# EAGLE board nonov1 (EAGLE 6.4)
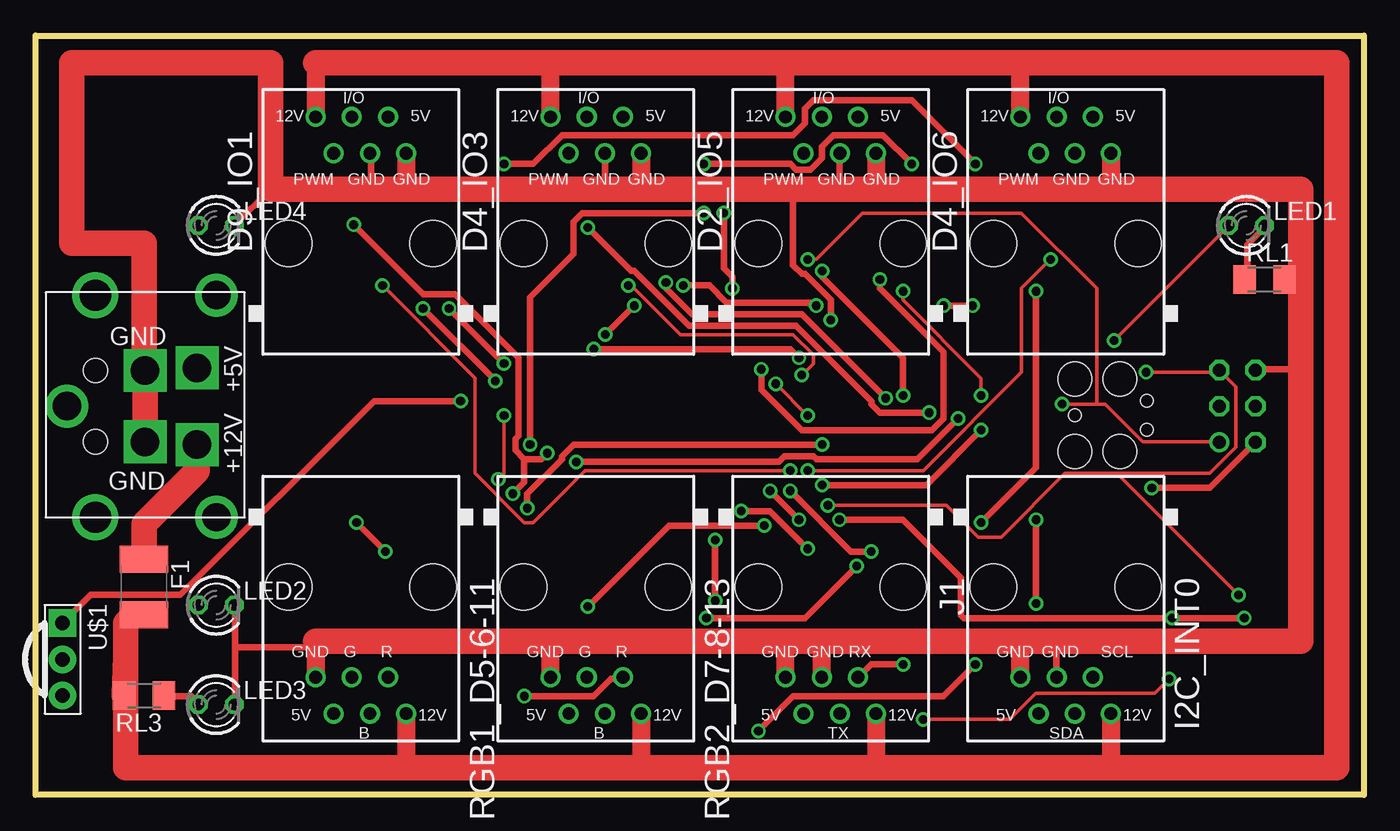
[diagram p0: board, top side]
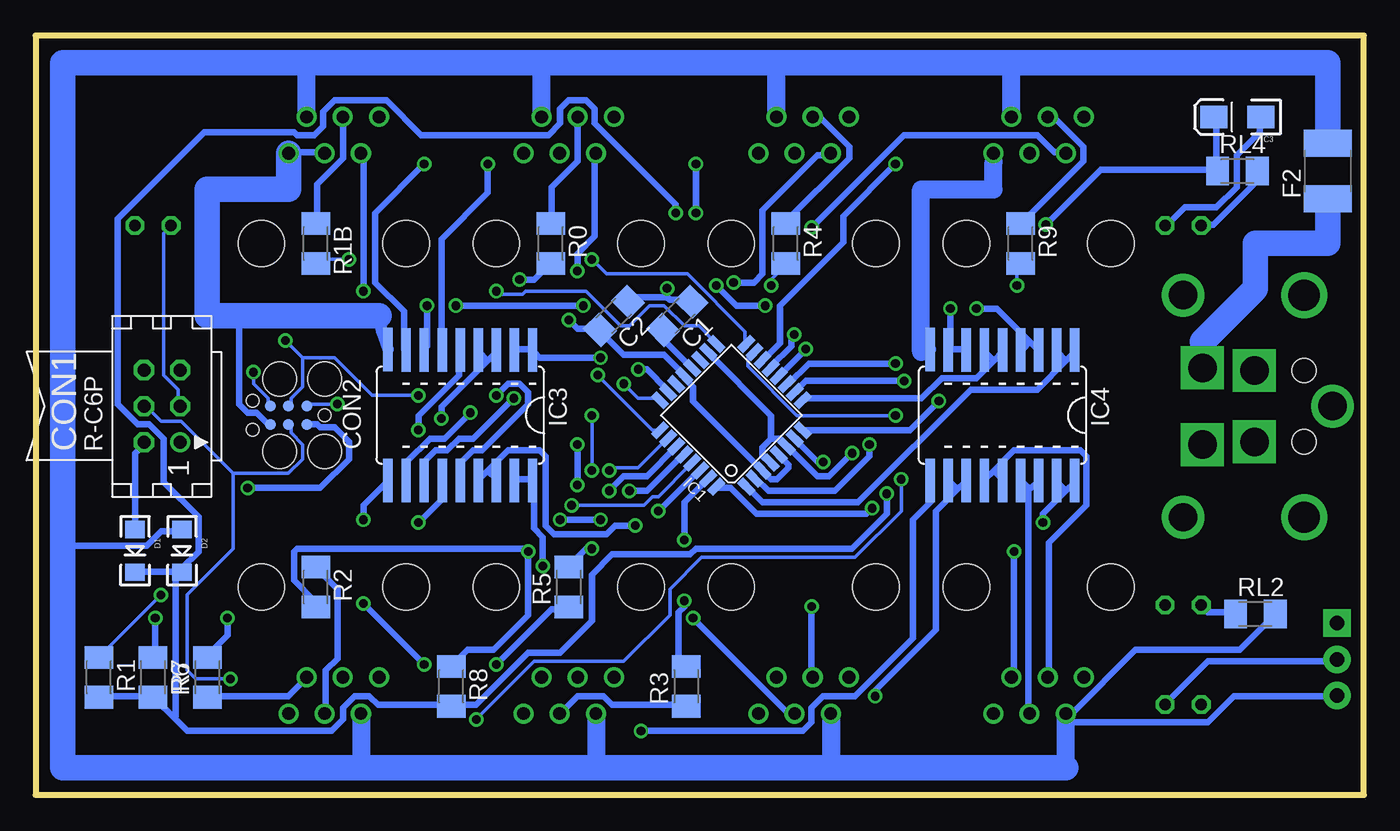
[diagram p1: board, bottom side, seen from below]

Size 93.34 x 53.34 mm. Coordinates in mm from the lower left corner, seen from the top.
Outline: 0,0 0,53.34 93.34,53.34 93.34,0 0,0
Copper layers (1*16): Top 0.035mm / dielectric 1.5mm / Bottom 0.035mm
Design rules "default *": minimum track width 10mil, minimum drill 24mil, track to track 8mil, track to pad 8mil, pad to pad 8mil, via to via 8mil, smd to smd 8mil, copper to edge 6mil, drill to drill 6mil, minimum pad ring 10mil, minimum via ring 8mil, stop-mask expansion 4mil, vias tented up to drill 0mil, thermal gap 10mil
Net classes: 0 default: width 0.457 mm; 1 power: width 0.457 mm; 2 highpower: width 0.914 mm; 3 fine: width 0.203 mm
vRestrict: area 35.7,17.5 to 53.6,35.5; area 19,19.7 to 31.8,24.8; area 19,28.6 to 31.8,33.7; area 57.2,28.6 to 69.8,33.7; area 57.2,19.7 to 69.8,24.8

## Footprints (pad centres in the part's own frame; a part is rotated, then mirrored left to right if it is on the bottom)
C1206 = smd 1.6 x 1.8: 1 -1.4,0; 2 1.4,0
EIA3216-KIT = smd 1.9 x 1.6: A 1.65,0; C -1.65,0
TINYISP = drill 0.914 octagon: GND 2.54,1.27; MOSI 0,1.27; RESET 2.54,-1.27; SCK 0,-1.27; VCC -2.54,1.27 | drill 0.914: MISO -2.54,-1.27
TC2030-MCP = smd 0.787 x 0.787: 5V 1.27,0.635; GND 3.81,0.635; MISO 1.27,-0.635; MOSI 2.54,0.635; RESET 3.81,-0.635; SCK 2.54,-0.635 | hole 0.889: 0,0; 5.08,-1.016; 5.08,1.016 | hole 2.375: 0,2.54; 0,-2.54; 3.175,-2.54; 3.175,2.54
LED-1206 = smd 1.2 x 1.4: A -1.5,0; C 1.5,0
RJ12-STRAIGHT = drill 0.9 pad 1.4: +5V 1.905,8.89; +12V -3.175,8.89; GND1 3.175,6.35; GND2 0.635,6.35; I/O -0.635,8.89; PWM -1.905,6.35 | hole 3.251: -5.08,0; 5.08,0
C1812 = smd 1.9 x 3.4: 1 -1.95,0; 2 1.95,0
RJ12-STRAIGHT-I2C = drill 0.9 pad 1.4: +5V 1.905,8.89; +12V -3.175,8.89; GND1 3.175,6.35; GND2 0.635,6.35; SCL -1.905,6.35; SDA -0.635,8.89 | hole 3.251: -5.08,0; 5.08,0
TQFP32-08 = smd 1.27 x 0.559: 1 -4.293,2.8; 2 -4.293,2; 3 -4.293,1.2; 4 -4.293,0.4; 5 -4.293,-0.4; 6 -4.293,-1.2; 7 -4.293,-2; 8 -4.293,-2.8; 17 4.293,-2.8; 18 4.293,-2; 19 4.293,-1.2; 20 4.293,-0.4; 21 4.293,0.4; 22 4.293,1.2; 23 4.293,2; 24 4.293,2.8 | smd 0.559 x 1.27: 9 -2.8,-4.293; 10 -2,-4.293; 11 -1.2,-4.293; 12 -0.4,-4.293; 13 0.4,-4.293; 14 1.2,-4.293; 15 2,-4.293; 16 2.8,-4.293; 25 2.8,4.293; 26 2,4.293; 27 1.2,4.293; 28 0.4,4.293; 29 -0.4,4.293; 30 -1.2,4.293; 31 -2,4.293; 32 -2.8,4.293
SO18W = smd 0.66 x 3.048: 1 -5.08,-4.585; 2 -3.81,-4.585; 3 -2.54,-4.585; 4 -1.27,-4.585; 5 0,-4.585; 6 1.27,-4.585; 7 2.54,-4.585; 8 3.81,-4.585; 9 5.08,-4.623; 10 5.08,4.585; 11 3.81,4.585; 12 2.54,4.585; 13 1.27,4.585; 14 0,4.585; 15 -1.27,4.585; 16 -2.54,4.585; 17 -3.81,4.585; 18 -5.08,4.585
RJ12-STRAIGHT-RS232 = drill 0.9 pad 1.4: +5V 1.905,8.89; +12V -3.175,8.89; GND1 3.175,6.35; GND2 0.635,6.35; RX -1.905,6.35; TX -0.635,8.89 | hole 3.251: -5.08,0; 5.08,0
LED3MM = drill 0.813 octagon: A -1.27,0; K 1.27,0
M1206 = smd 1.6 x 2: 1 -1.4,0; 2 1.4,0
RJ12-STRAIGHT-RGB = drill 0.9 pad 1.4: +5V 1.905,8.89; +12V -3.175,8.89; B -0.635,8.89; G 0.635,6.35; GND1 3.175,6.35; R -1.905,6.35 | hole 3.251: -5.08,0; 5.08,0
PNA460XM = drill 1.016 pad 1.93 square: 1 -2.54,0 | drill 1.016 pad 1.93: 2 0,0; 3 2.54,0
KPJX-4S-S = drill 2 square: +5V 2.7,1.35; +12V -2.7,1.35; GND1 -2.5,5; GND2 2.5,5 | drill 2: P$1 -7.8,0; P$2 7.8,0; P$11 0,10.5 | drill 2.2: P$3 -7.8,8.5; P$4 7.8,8.5 | hole 1.7: -2.5,8.5; 2.5,8.5

## Placement (x,y rotation side)
C1  0.1uF  [C1206]  48.26,33.66 225 bottom
C2  0.1uF  [C1206]  52.7,33.66 225 bottom
C3  10uF 20V  [EIA3216-KIT]  8.89,47.62 180 bottom
CON1  [TINYISP]  84.45,27.31 90 bottom
CON2  [TC2030-MCP]  73.03,26.67 180 bottom
D1  1N581D1206  [LED-1206]  86.36,17.15 270 bottom
D2  1N581D1206  [LED-1206]  83.06,17.15 270 bottom
D2_IO5  IO5  [RJ12-STRAIGHT]  55.88,38.73 0 top
D4_IO3  IO3  [RJ12-STRAIGHT]  39.37,38.73 0 top
D4_IO6  IO6  [RJ12-STRAIGHT]  72.39,38.73 0 top
D9_IO1  IO1  [RJ12-STRAIGHT]  22.86,38.73 0 top
F1  POLYSWITCHSMD1812  [C1812]  7.62,14.61 270 top
F2  POLYSWITCHSMD1812  [C1812]  2.54,43.81 90 bottom
I2C_INT0  I2C  [RJ12-STRAIGHT-I2C]  72.39,14.61 180 top
IC1  MEGA8-AI  [TQFP32-08]  44.45,26.67 135 bottom
IC3  ULN2803A  [SO18W]  63.5,26.67 180 bottom
IC4  ULN2803A  [SO18W]  25.4,26.67 180 bottom
J1  RJ12STRAIGHT-RS232-SERVER  [RJ12-STRAIGHT-RS232]  55.88,14.61 180 top
LED1  [LED3MM]  85.09,40 0 top
LED2  [LED3MM]  12.7,13.33 0 top
LED3  [LED3MM]  12.7,6.35 0 top
LED4  [LED3MM]  12.7,40 0 top
R0  1K  [M1206]  57.15,38.73 270 bottom
R1  10k  [M1206]  88.9,8.26 270 bottom
R1B  1K  [M1206]  73.66,38.73 270 bottom
R2  1K  [M1206]  73.66,14.61 270 bottom
R3  1K  [M1206]  47.62,7.62 90 bottom
R4  1K  [M1206]  40.64,38.73 270 bottom
R5  1K  [M1206]  55.88,14.61 90 bottom
R6  1K  [M1206]  81.28,8.26 90 bottom
R7  10K  [M1206]  85.09,8.26 270 bottom
R8  10K  [M1206]  64.14,7.62 270 bottom
R9  1K  [M1206]  24.13,38.73 270 bottom
RGB1_D5-6-11  RGB1  [RJ12-STRAIGHT-RGB]  22.86,14.61 180 top
RGB2_D7-8-13  RGB2  [RJ12-STRAIGHT-RGB]  39.37,14.61 180 top
RL1  1K  [M1206]  86.36,36.2 0 top
RL2  1K  [M1206]  7.62,12.7 0 bottom
RL3  1K  [M1206]  7.62,6.98 180 top
RL4  1K  [M1206]  8.89,43.81 0 bottom
U$1  PNA460XM  [PNA460XM]  1.91,9.53 270 top
U$2  KPJX-4S-S  [KPJX-4S-S]  12.7,27.31 90 top

## Library data of the parts
C1 C2 R0 R1 R1B R2-R9 RL1-RL4 = resistor
C3 = SparkFun
CON1 = lpatiny; OC_FARNELL: unknown; OC_NEWARK: unknown
CON2 D1 D2 D2_IO5 D4_IO3 D4_IO6 D9_IO1 F1 F2 I2C_INT0 IC3 IC4 J1 LED1-LED4 RGB1_D5-6-11 RGB2_D7-8-13 U$2 = lpatiny
IC1 = atmel; MPN: ATMEGA8-16AU; OC_FARNELL: 9171371; OC_NEWARK: 73M8863
U$1 = adafruit

## Nets
5V [power]: C1.1 C2.1 C3.A D1.C D2.C IC1.4 IC1.6 IC1.18 R1.2 R7.2 R8.2 RL4.1
+5V: D2.A D2_IO5.+5V D4_IO3.+5V D4_IO6.+5V D9_IO1.+5V F2.2 I2C_INT0.+5V J1.+5V RGB1_D5-6-11.+5V RGB2_D7-8-13.+5V RL2.2 U$1.3
+12V [highpower]: D2_IO5.+12V D4_IO3.+12V D4_IO6.+12V D9_IO1.+12V F1.2 I2C_INT0.+12V J1.+12V RGB1_D5-6-11.+12V RGB2_D7-8-13.+12V RL3.2
A0: IC1.23 R0.2
A1 [fine]: IC1.24 R1B.2
A2 [fine]: IC1.25 R4.2
A3 [fine]: IC1.26 R9.2
A6: IC1.19
A7: IC1.22
COM: IC3.10 IC4.10
D2: IC1.32 IC3.5
D2B: D4_IO3.I/O R4.1
D2B1: D9_IO1.I/O R9.1
D2B4: I2C_INT0.SDA R2.1
D2B5: J1.TX R3.1
D2B6: D2_IO5.I/O R0.1
D2B7: D4_IO6.I/O R1B.1
D3: IC1.1 IC4.1 IC4.2
D4: IC1.2 IC3.6
D5: IC1.9 IC4.5 IC4.6
D6: IC1.10 IC4.3 IC4.4
D7: IC1.11 IC4.7 IC4.8
D8: IC1.12 IC3.1 IC3.2
D9: IC1.13 IC3.7
D10: IC1.14 IC3.8
D14: IC1.7 IC3.3 IC3.4
D15: IC1.8 U$1.1
GND [power]: C2.2 C3.C CON1.GND CON2.GND D2_IO5.GND1 D2_IO5.GND2 D4_IO3.GND1 D4_IO3.GND2 D4_IO6.GND1 D4_IO6.GND2 D9_IO1.GND1 D9_IO1.GND2 I2C_INT0.GND1 I2C_INT0.GND2 IC1.3 IC1.5 IC1.21 IC3.9 IC4.9 J1.GND1 J1.GND2 LED2.K LED3.K LED4.K RGB1_D5-6-11.GND1 RGB2_D7-8-13.GND1 RL1.2 U$1.2 U$2.GND1 U$2.GND2
ISP+5V: CON1.VCC CON2.5V D1.A
MISO [fine]: CON1.MISO CON2.MISO IC1.16
MOSI [fine]: CON1.MOSI CON2.MOSI IC1.15
N$1 [power]: IC4.13 IC4.14 RGB1_D5-6-11.G
N$2: D4_IO6.PWM IC3.13
N$3: LED1.K RL1.1
N$4: C1.2 IC1.20
N$5 [power]: IC4.11 IC4.12 RGB2_D7-8-13.R
N$6: F2.1 U$2.+5V
N$7: LED4.A RL4.2
N$8: F1.1 U$2.+12V
N$22 [power]: D4_IO3.PWM IC3.12
N$48 [power]: IC3.17 IC3.18 RGB2_D7-8-13.B
N$50 [power]: IC4.15 IC4.16 RGB1_D5-6-11.B
N$51 [power]: D9_IO1.PWM IC3.11
N$57 [power]: IC3.15 IC3.16 RGB2_D7-8-13.G
N$60 [power]: D2_IO5.PWM IC3.14
N$68 [power]: IC4.17 IC4.18 RGB1_D5-6-11.R
N$70: J1.RX R5.1
N$71: I2C_INT0.SCL R6.1
N$75: LED3.A RL3.1
N$76: LED2.A RL2.1
RESET [fine]: CON1.RESET CON2.RESET IC1.29 R1.1
RX: IC1.30 R5.2
SCK [fine]: CON1.SCK CON2.SCK IC1.17 LED1.A
SCL: IC1.28 R6.2 R7.1
SDA: IC1.27 R2.2 R8.1
TX: IC1.31 R3.2

## Tracks (layer width: path | path; a pad name or v marks a point on that pad's centre or on a via)
5V  (via drill 0.61)
  Top 0.457: v22.35,40.06 27.23,35.18 29.46,35.18 33.93,30.71 33.93,25.22 33.73,25.02 33.73,24.21 34.34,23.6 | 34.34,23.6 35.56,23.6 v35.97,24 | v48.97,35.59 48.97,36.4 48.36,37.01 v48.36,40.87 | 34.34,23.6 34.34,21.97 v33.53,21.16
  Bottom 0.457: C3.A 10.36,47.57 10.36,43.92 RL4.1 10.57,43.92 18.49,43.92 v22.35,40.06 | 41.66,25.02 42.27,24.41 42.27,23.8 41.86,23.39 IC1.4 | 41.66,25.02 41.05,25.02 40.64,24.61 IC1.6 40.44,24.41 38.41,22.38 37.59,22.38 v35.97,24 | 41.66,25.02 41.66,26.65 46.13,31.12 IC1.18 | 48.97,34.98 48.77,34.77 47.35,34.77 C1.1 | 48.97,34.98 51.41,34.98 51.61,34.77 C2.1 | D2.C 83.11,15.67 86.36,15.67 D1.C | 83.62,5.41 84.94,6.73 R7.2 85.14,6.93 88.8,6.93 R1.2 | 83.62,5.41 82.7,4.5 72.54,4.5 71.73,5.31 71.73,6.12 70.92,6.93 69.9,6.93 69.29,6.33 64.21,6.33 R8.2 64.01,6.33 62.38,6.33 58.73,9.98 56.49,9.98 54.25,12.22 54.25,15.47 52.83,16.89 47.35,16.89 46.94,17.3 35.97,17.3 33.53,19.74 v33.53,21.16 | D2.C 83.52,15.47 83.52,5.51 83.62,5.41 | v48.97,35.59 48.97,34.98 | v48.36,40.87 48.36,41.48 54.05,47.17 54.05,48.18 54.66,48.79 55.88,48.79 56.49,48.18 56.49,47.17 57.3,46.35 66.24,46.35 68.68,48.79 72.34,48.79 73.15,47.98 73.15,46.96 73.76,46.35 74.98,46.35 75.18,46.56 81.48,46.56 87.58,40.46 87.58,27.46 86.16,26.04 85.34,26.04 84.33,25.02 84.33,21.97 81.89,19.53 81.89,17.09 83.11,15.88 D2.C
+5V
  Bottom 0.457: 91.44,17.5 85.55,17.5 84.53,18.52 83.11,18.52 D2.A | RL2.2 6.3,12.62 8.74,10.19 16.05,10.19 20.52,5.71 RGB1_D5-6-11.+5V | 20.95,5.1 10.97,5.1 9.14,6.93 2.03,6.93 U$1.3
  Bottom 1.27: 20.95,1.91 20.95,5.1 RGB1_D5-6-11.+5V | RGB2_D7-8-13.+5V 37.47,1.91 | J1.+5V 53.98,1.91 | I2C_INT0.+5V 70.48,1.91 | D4_IO6.+5V 74.3,51.43 | D2_IO5.+5V 57.78,51.43 | D4_IO3.+5V 41.27,51.43 | D9_IO1.+5V 24.77,51.43
  Bottom 1.778: 20.95,1.91 37.47,1.91 53.98,1.91 70.48,1.91 91.44,1.91 91.44,17.5 91.44,51.43 74.3,51.43 57.78,51.43 41.27,51.43 24.77,51.43 2.54,51.43 F2.2
+12V
  Top 1.27: 19.68,51.43 D9_IO1.+12V | D4_IO3.+12V 36.2,51.43 | RGB1_D5-6-11.+12V 26.04,1.91 | RGB2_D7-8-13.+12V 42.55,1.91 | J1.+12V 59.05,1.91 | I2C_INT0.+12V 75.56,1.91 | D4_IO6.+12V 69.22,51.43 | D2_IO5.+12V 52.7,51.43
  Top 1.778: 19.68,51.43 36.2,51.43 52.7,51.43 69.22,51.43 91.44,51.43 91.44,1.91 75.56,1.91 59.05,1.91 42.55,1.91 26.04,1.91 6.35,1.91 6.35,9.39 RL3.2 6.35,9.65 6.35,12.06 6.94,12.65 F1.2
A0  (via drill 0.61)
  Top 0.457: v51,29.9 51,28.47 53.85,25.63 62.99,25.63 63.8,26.44 63.8,31.12 59.33,35.59 v59.33,36.2
  Bottom 0.457: v51,29.9 50.39,29.9 48.97,28.47 IC1.23 | v59.33,36.2 58.32,36.2 57.3,37.21 R0.2
A1  (via drill 0.61)
  Top 0.254: v54.25,26.65 v52.02,28.88 | v54.25,22.78 62.38,22.78 69.29,29.69 69.29,35.59 v71.32,37.62
  Bottom 0.254: v52.02,28.88 51,27.86 49.58,27.86 IC1.24 | v54.25,22.78 v54.25,26.65 | v71.32,37.62 73.36,37.62 73.56,37.41 R1B.2
A2  (via drill 0.61)
  Top 0.254: v53.85,29.49 54.66,30.3 54.66,30.91 53.24,32.33 45.31,32.33 41.86,35.79 v41.66,35.79
  Bottom 0.254: v53.85,29.49 49.99,25.63 49.58,25.63 IC1.25 | v41.66,35.79 41.66,36.2 40.64,37.21 R4.2
A3  (via drill 0.61)
  Top 0.254: v53.03,22.78 38.61,22.78 34.95,19.13 34.34,19.13 30.89,22.58 30.89,29.29 v24.38,35.79
  Bottom 0.254: v53.03,22.78 52.83,22.99 51,22.99 48.97,25.02 IC1.26 | v24.38,35.79 24.38,37.01 24.18,37.21 R9.2
COM  (via drill 0.61)
  Top 0.457: v50.8,4.5 53.24,6.93 63.8,6.93 v66.04,9.17 | v70.31,19.33 v70.31,13.44
  Bottom 0.457: IC4.10 30.48,20.55 31.7,19.33 31.7,11 35.76,6.93 38,6.93 38.81,6.12 38.81,5.1 39.42,4.5 v50.8,4.5 | v70.31,13.44 v66.04,9.17 | v70.31,19.33 70.31,20.35 68.68,21.97 IC3.10
D2  (via drill 0.61)
  Top 0.457: v34.54,20.14 34.54,21.16 36.98,23.6 36.98,23.8 37.8,24.61 v55.27,24.61 | v55.27,21.77 62.59,21.77 v66.45,25.63
  Bottom 0.457: v34.54,20.14 34.95,19.74 42.67,19.74 44.5,21.57 45.31,21.57 IC1.32 | v55.27,21.77 v55.27,24.61 | v66.45,25.63 66.45,26.65 63.6,29.49 63.6,31.12 IC3.5
D2B
  Bottom 0.457: R4.1 40.64,40.26 36.17,44.73 36.17,45.54 38.2,47.57 38.61,47.57 D4_IO3.I/O
D2B1
  Bottom 0.457: R9.1 23.98,40.26 19.71,44.53 19.71,45.54 21.74,47.57 22.15,47.57 D9_IO1.I/O
D2B4
  Bottom 0.457: R2.1 73.56,15.88 72.14,14.45 72.14,9.58 72.95,8.76 72.95,5.71 I2C_INT0.SDA
D2B5
  Bottom 0.457: R3.1 47.75,6.33 52.83,6.33 53.44,6.93 55.27,6.93 56.49,5.71 J1.TX
D2B6
  Bottom 0.457: R0.1 57.1,40.26 57.1,42.7 55.27,44.53 55.27,47.57 D2_IO5.I/O
D2B7
  Bottom 0.457: R1B.1 73.56,40.26 73.56,42.9 71.73,44.73 71.73,47.57 D4_IO6.I/O
D3
  Bottom 0.457: 20.93,30.51 20.32,31.12 IC4.1 | 20.93,30.51 22.96,28.47 27.64,28.47 35.56,20.55 42.27,20.55 43.28,21.57 IC1.1 | 20.93,30.51 21.54,31.12 IC4.2
D4  (via drill 0.61)
  Top 0.457: v34.75,24.61 34.75,34.98 37.8,38.02 37.8,40.26 38.41,40.87 v46.94,40.87 | v46.94,44.32 53.03,44.32 53.44,43.92 54.46,43.92 55.27,44.73 55.27,45.54 56.08,46.35 59.54,46.35 v61.57,44.32
  Bottom 0.457: v34.75,24.61 34.75,23.8 37.19,21.36 41.86,21.36 42.67,22.17 IC1.2 | v46.94,44.32 v46.94,40.87 | v61.57,44.32 61.57,42.29 64.82,39.04 64.82,31.32 IC3.6
D5
  Bottom 0.457: 26.01,30.51 25.4,31.12 IC4.5 | 26.01,30.51 27.23,29.29 29.67,29.29 31.09,27.86 39.42,27.86 IC1.9 | 26.01,30.51 26.62,31.12 IC4.6
D6  (via drill 0.61)
  Top 0.457: v27.23,34.16 v32.31,29.08
  Bottom 0.457: v32.31,29.08 39.22,29.08 39.83,28.47 IC1.10 | v27.23,34.16 25.81,34.16 23.47,31.83 | 23.47,31.83 22.96,31.32 IC4.3 | 23.47,31.83 23.98,31.32 IC4.4
D7  (via drill 0.61)
  Top 0.457: v29.06,34.16 v32.92,30.3
  Bottom 0.457: v32.92,30.3 39.01,30.3 40.44,28.88 IC1.11 | 29.06,31.32 v29.06,34.16 | 29.06,31.32 IC4.8 | 29.06,31.32 28.04,31.32 IC4.7
D8  (via drill 0.61)
  Top 0.457: v39.22,31.32 53.03,31.32 v53.65,30.71
  Bottom 0.457: v39.22,31.32 41.05,29.49 IC1.12 | v53.65,30.71 57.91,30.71 58.32,31.12 IC3.1 58.52,31.32 59.54,31.32 IC3.2
D9  (via drill 0.61)
  Top 0.457: v42.06,34.37 v40.03,32.33 | v45.52,35.79 47.35,35.79 48.56,34.57 54.66,34.57 v54.86,34.37 | v65.84,34.37 v63.8,34.37
  Bottom 0.457: v40.03,32.33 40.23,32.13 40.23,31.52 41.66,30.1 IC1.13 | v42.06,34.37 44.09,34.37 v45.52,35.79 | v63.8,34.37 v54.86,34.37 | v65.84,34.37 65.84,31.52 66.04,31.32 IC3.7
D10  (via drill 0.61)
  Top 0.457: v32.92,44.32 34.95,44.32 36.98,46.35 53.24,46.35 54.05,47.17 54.05,48.18 54.66,48.79 61.57,48.79 v66.04,44.32
  Bottom 0.457: v32.92,44.32 36.58,40.66 36.58,38.84 41.05,34.37 41.05,31.73 42.06,30.71 IC1.14 | v66.04,44.32 69.49,40.87 69.49,35.99 67.46,33.96 67.46,31.32 IC3.8
D14  (via drill 0.61)
  Top 0.457: v38,23.39 52.22,23.39 52.63,23.8 54.66,23.8 54.86,23.6 61.98,23.6 v64.82,26.44
  Bottom 0.457: v38,23.39 38.41,23.39 40.03,25.02 IC1.7 | v64.82,26.44 64.82,27.25 61.57,30.51 | 61.57,30.51 60.96,31.12 IC3.3 | 61.57,30.51 62.18,31.12 IC3.4
D15  (via drill 0.61)
  Top 0.457: v29.87,27.66 23.77,27.66 10.16,14.05 3.86,14.05 2.03,12.22 U$1.1
  Bottom 0.457: v29.87,27.66 31.9,25.63 39.42,25.63 IC1.8
GND  (via drill 0.61)
  Top 0.457: 14.02,10.39 14.02,13.23 LED2.K | 14.02,10.39 14.02,6.53 LED3.K | RL1.2 88.9,36.2 | 23.57,42.54 23.57,44.93 D9_IO1.GND2 | 71.73,10.79 71.73,8.36 I2C_INT0.GND2 | 40.03,42.54 40.03,44.93 D4_IO3.GND2 | 56.49,42.54 56.49,44.93 D2_IO5.GND2 | 88.9,29.9 85.75,29.9 CON1.GND | 16.51,42.54 LED4.K | v55.88,33.35 55.88,34.77 54.05,36.6 53.85,36.6 53.24,37.21 53.24,42.54 | 14.02,10.39 18.9,10.39 19.68,10.79
  Top 1.27: U$2.GND2 7.62,29.81 | 19.68,10.79 RGB1_D5-6-11.GND1 | RGB2_D7-8-13.GND1 36.2,10.79 | J1.GND1 52.7,10.79 | I2C_INT0.GND1 69.22,10.79 | J1.GND2 55.24,10.79 | D4_IO6.GND1 75.56,42.54 | D2_IO5.GND1 59.05,42.54 | D4_IO3.GND1 42.55,42.54 | D9_IO1.GND1 26.04,42.54
  Top 1.778: U$2.GND1 U$2.GND2 | 7.62,29.81 7.62,38.73 2.54,38.73 2.54,51.43 16.51,51.43 16.51,42.54 23.57,42.54 26.04,42.54 40.03,42.54 42.55,42.54 53.24,42.54 56.49,42.54 59.05,42.54 75.56,42.54 88.9,42.54 88.9,36.2 88.9,29.9 88.9,10.79 71.73,10.79 69.22,10.79 55.24,10.79 52.7,10.79 36.2,10.79 19.68,10.79
  Bottom 0.457: U$1.2 2.03,9.37 10.97,9.37 13.82,6.53 LED3.K | 41.25,24 IC1.5 41.05,23.8 40.44,23.19 40.44,22.99 41.25,22.17 41.66,22.17 IC1.3 | 47.95,29.49 IC1.21 | IC1.21 47.95,29.69 49.17,30.91 52.02,30.91 53.65,32.54 C2.2 53.85,32.74 55.27,32.74 v55.88,33.35 | IC1.3 47.14,27.66 47.14,28.68 47.75,29.29 IC1.21 | IC1.3 | C3.C 7.32,47.57 7.32,46.56 8.94,44.93 8.94,42.7 10.36,41.27 12.6,41.27 13.82,40.06 LED4.K | 79.05,33.66 79.05,27.46 78.44,26.85 77.83,26.85 77.01,26.04 CON2.GND | D4_IO6.GND2 73.15,45.14 74.78,45.14 D4_IO6.GND1 | 26.04,44.45 26.21,44.93 D9_IO1.GND1
  Bottom 0.813: IC4.9 31.11,31.29 31.11,31.12 | IC3.9 69.04,32.56 69.22,33.66
  Bottom 1.27: 31.11,31.12 31.11,42.54 26.04,42.54 26.04,44.45
  Bottom 1.778: 69.22,33.66 79.05,33.66 81.28,33.66 81.28,42.54 75.56,42.54 D4_IO6.GND1
ISP+5V  (via drill 0.61)
  Top 0.457: v78.44,21.57 82.5,21.57 85.55,24.61 CON1.VCC
  Bottom 0.457: CON2.5V 73.56,26.04 73.36,25.83 72.34,25.83 71.32,24.82 71.32,23.6 73.36,21.57 v78.44,21.57 | D1.A 86.36,24 85.75,24.61 CON1.VCC
MISO  (via drill 0.61)
  Top 0.254: 74.57,27.46 75.18,27.46 77.83,24.82 83.11,24.82 CON1.MISO | 74.57,27.46 v72.14,27.46 | v54.25,37.62 54.86,37.62 58.12,40.87 69.29,40.87 74.57,35.59 74.57,27.46
  Bottom 0.254: v72.14,27.46 74.17,27.46 CON2.MISO | v54.25,37.62 53.24,36.6 47.55,36.6 43.48,32.54 43.48,31.73 IC1.16
MOSI  (via drill 0.61)
  Top 0.254: v32.92,26.65 32.92,22.58 v32.51,22.17 | v62.38,5.31 68.48,5.31 70.31,7.14 78.64,7.14 v79.65,8.15
  Bottom 0.254: 79.45,22.58 75.59,22.58 74.57,23.6 74.57,24.61 75.39,25.43 75.39,26.04 CON2.MOSI | 79.45,22.58 83.11,26.24 84.53,26.24 85.55,27.25 CON1.MOSI | v32.92,26.65 39.83,26.65 43.28,30.1 43.28,30.71 42.88,31.12 IC1.15 | v32.51,22.17 32.51,19.94 35.76,16.69 46.53,16.69 48.77,14.45 48.77,12.62 52.02,9.37 58.32,9.37 v62.38,5.31 | v79.65,8.15 82.09,8.15 82.7,8.76 82.7,14.05 79.45,17.3 79.45,22.58
N$1
  Bottom 0.457: 26.01,22.78 26.62,22.17 IC4.13 | 26.01,22.78 24.59,24.21 19.91,24.21 19.51,23.8 19.51,20.35 22.15,17.7 22.15,8.36 RGB1_D5-6-11.G | 26.01,22.78 25.4,22.17 IC4.14
N$2  (via drill 0.61)
  Top 0.457: v70.31,35.38 70.31,22.99 v66.45,19.13
  Bottom 0.457: v70.31,35.38 70.31,44.93 D4_IO6.PWM | v66.45,19.13 64.82,20.75 64.82,21.97 IC3.13
N$3
  Top 0.457: RL1.1 85.14,36.2 85.14,38.63 86.36,39.85 LED1.K
N$4
  Bottom 0.457: IC1.20 47.35,30.1 49.17,31.93 49.17,32.54 C1.2
N$5  (via drill 0.61)
  Top 0.457: v34.34,6.93 39.22,6.93 40.44,8.15 41.25,8.15 RGB2_D7-8-13.R
  Bottom 0.457: v34.34,6.93 34.34,7.34 30.07,11.61 30.07,19.94 28.55,21.46 | 28.55,21.46 28.04,21.97 IC4.12 | 28.55,21.46 29.06,21.97 IC4.11
N$6
  Bottom 0.457: U$2.+5V 11.38,30.1 11.38,31.12 11.35,31.83
  Bottom 1.778: 11.35,31.83 7.62,35.56 7.62,38.73 2.54,38.73 F2.1
N$7
  Bottom 0.457: RL4.2 7.52,43.71 7.52,43.1 10.57,40.06 11.38,40.06 LED4.A
N$8
  Top 1.778: U$2.+12V 11.35,22.78 7.62,19.05 F1.1
N$22  (via drill 0.61)
  Top 0.457: v44.3,35.99 44.3,35.59 46.13,33.76 53.85,33.76 v59.74,27.86
  Bottom 0.457: v44.3,35.99 42.88,35.99 42.27,36.6 42.27,41.07 38.41,44.93 37.59,44.93 D4_IO3.PWM | v59.74,27.86 62.59,25.02 63.6,25.02 64.41,24.21 65.23,24.21 66.04,23.39 IC3.12
N$48  (via drill 0.61)
  Top 0.457: v47.14,12.42 54.05,12.42 v57.71,16.08
  Bottom 0.457: RGB2_D7-8-13.B 40.44,5.71 v47.14,12.42 | v57.71,16.08 57.71,18.11 58.32,18.72 58.32,21.97 IC3.18 58.52,22.17 59.54,22.17 IC3.17
N$50
  Bottom 0.457: 23.57,21.57 23.57,5.71 RGB1_D5-6-11.B | 23.57,21.57 23.98,21.97 IC4.15 | IC4.16 22.96,21.97 23.37,21.57 23.57,21.57
N$51  (via drill 0.61)
  Top 0.457: v38.81,39.85 41.86,36.8 42.06,36.8 45.92,32.94 53.44,32.94 58.73,27.66 58.73,27.46 59.33,26.85 v62.79,26.85
  Bottom 0.457: v38.81,39.85 32.31,46.35 22.96,46.35 21.74,45.14 21.13,45.14 D9_IO1.PWM | v62.79,26.85 64.62,25.02 65.63,25.02 67.26,23.39 67.26,22.17 IC3.11
N$57  (via drill 0.61)
  Top 0.457: v38.81,13.23 44.5,18.92 v51.21,18.92
  Bottom 0.457: v38.81,13.23 38.81,8.36 RGB2_D7-8-13.G | v51.21,18.92 52.63,18.92 53.24,18.31 56.9,18.31 57.51,18.92 57.51,23.8 57.91,24.21 60.15,24.21 61.57,22.78 | 61.57,22.78 62.18,22.17 IC3.15 | 61.57,22.78 60.96,22.17 IC3.16
N$60  (via drill 0.61)
  Top 0.457: v55.27,36.8 55.27,36.4 60.96,30.71 v60.96,28.07
  Bottom 0.457: v55.27,36.8 55.27,38.02 54.05,39.24 54.05,44.93 D2_IO5.PWM | v60.96,28.07 60.15,28.88 59.33,28.88 58.73,28.27 58.73,27.46 61.98,24.21 62.59,24.21 63.4,23.39 63.4,22.17 IC3.14
N$68  (via drill 0.61)
  Top 0.457: v22.55,19.13 v24.59,17.09
  Bottom 0.457: v24.59,17.09 24.59,8.36 RGB1_D5-6-11.R | v22.55,19.13 22.55,19.74 20.93,21.36 | 20.93,21.36 20.32,21.97 IC4.18 | 20.93,21.36 21.54,21.97 IC4.17
N$70  (via drill 0.61)
  Top 0.457: v60.96,9.17 58.73,9.17 57.91,8.36 J1.RX
  Bottom 0.457: v60.96,9.17 57.1,13.03 55.88,13.03 R5.1
N$71
  Bottom 0.457: R6.1 81.28,6.93 75.59,6.93 74.37,8.15 I2C_INT0.SCL
N$75
  Top 0.457: RL3.1 9.14,6.93 10.97,6.93 11.38,6.53 LED3.A
N$76
  Bottom 0.457: RL2.1 9.14,12.83 10.97,12.83 11.38,13.23 LED2.A
RESET  (via drill 0.61)
  Top 0.254: v78.03,29.69 83.11,29.69 CON1.RESET 83.31,29.69 84.33,28.68 84.33,24.41 82.5,22.58 76,22.58 | v55.68,20.35 64.01,20.35 66.24,18.11 67.87,18.11 72.34,22.58 76,22.58 | 76,22.58 v84.53,14.05
  Bottom 0.254: v78.03,29.69 78.03,28.88 77.01,27.86 77.01,27.46 CON2.RESET | v55.68,20.35 50.6,20.35 49.99,20.96 49.58,20.96 47.35,23.19 IC1.29 | v84.53,14.05 88.8,9.78 R1.1
RX  (via drill 0.61)
  Top 0.457: v49.58,19.94 51.61,19.94 v54.25,17.3
  Bottom 0.457: v49.58,19.94 46.74,22.78 IC1.30 | v54.25,17.3 54.66,17.3 55.88,16.08 R5.2
SCK  (via drill 0.61)
  Top 0.254: v75.79,31.93 83.72,39.85 LED1.A | v60.96,35.38 60.96,34.77 66.45,29.29 v66.45,28.07
  Bottom 0.254: 74.57,30.71 74.57,28.68 75.39,27.86 75.39,27.46 CON2.SCK | v75.79,31.93 74.57,30.71 | v60.96,35.38 60.76,35.18 59.13,35.18 58.93,35.38 54.66,35.38 52.22,32.94 51.61,32.94 50.19,34.37 49.17,34.37 47.75,32.94 46.74,32.94 45.52,31.73 IC1.17 | v66.45,28.07 69.7,28.07 72.34,30.71 74.57,30.71 | CON1.SCK 83.31,27.46 83.31,28.47 84.33,29.49 84.33,39.45 83.92,39.85 LED1.A
SCL  (via drill 0.61)
  Top 0.457: v53.65,19.33 v51.61,21.36 | v56.49,19.33 60.96,19.33 65.02,15.27 65.02,12.62 65.23,12.42 v79.86,12.42 v84.94,12.42
  Bottom 0.457: v51.61,21.36 50.39,21.36 47.95,23.8 IC1.28 | v56.49,19.33 v53.65,19.33 | v79.86,12.42 79.86,11.2 81.28,9.78 R6.2 | v84.94,12.42 84.94,9.78 R7.1
SDA  (via drill 0.61)
  Top 0.457: v53.03,21.36 57.3,17.09 v58.73,17.09
  Bottom 0.457: v53.03,21.36 52.02,22.38 50.39,22.38 48.36,24.41 IC1.27 | R8.1 64.01,9.17 62.99,10.19 61.16,10.19 58.73,12.62 v58.73,17.09 58.73,17.3 74.98,17.3 75.18,17.09 75.18,15.06 73.76,13.64 73.76,13.23 R2.2
TX  (via drill 0.61)
  Top 0.457: v47.75,13.64 v47.75,17.91
  Bottom 0.457: v47.75,17.91 47.75,20.55 46.13,22.17 IC1.31 | v47.75,13.64 47.75,13.23 48.16,12.83 48.16,9.58 47.75,9.17 R3.2